# EAGLE board JeeNodeJR_LIPO_v1.2 (EAGLE 5.10)
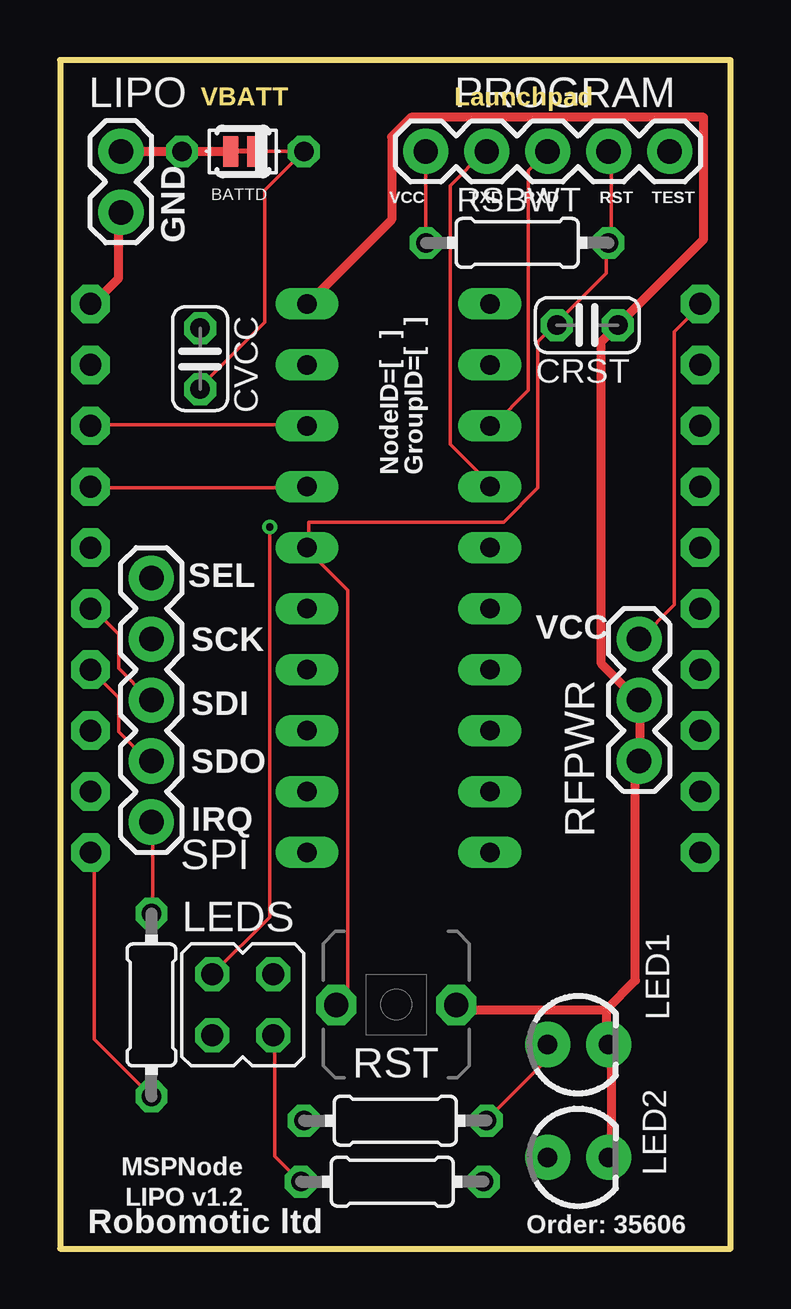
[diagram p0: board, top side]
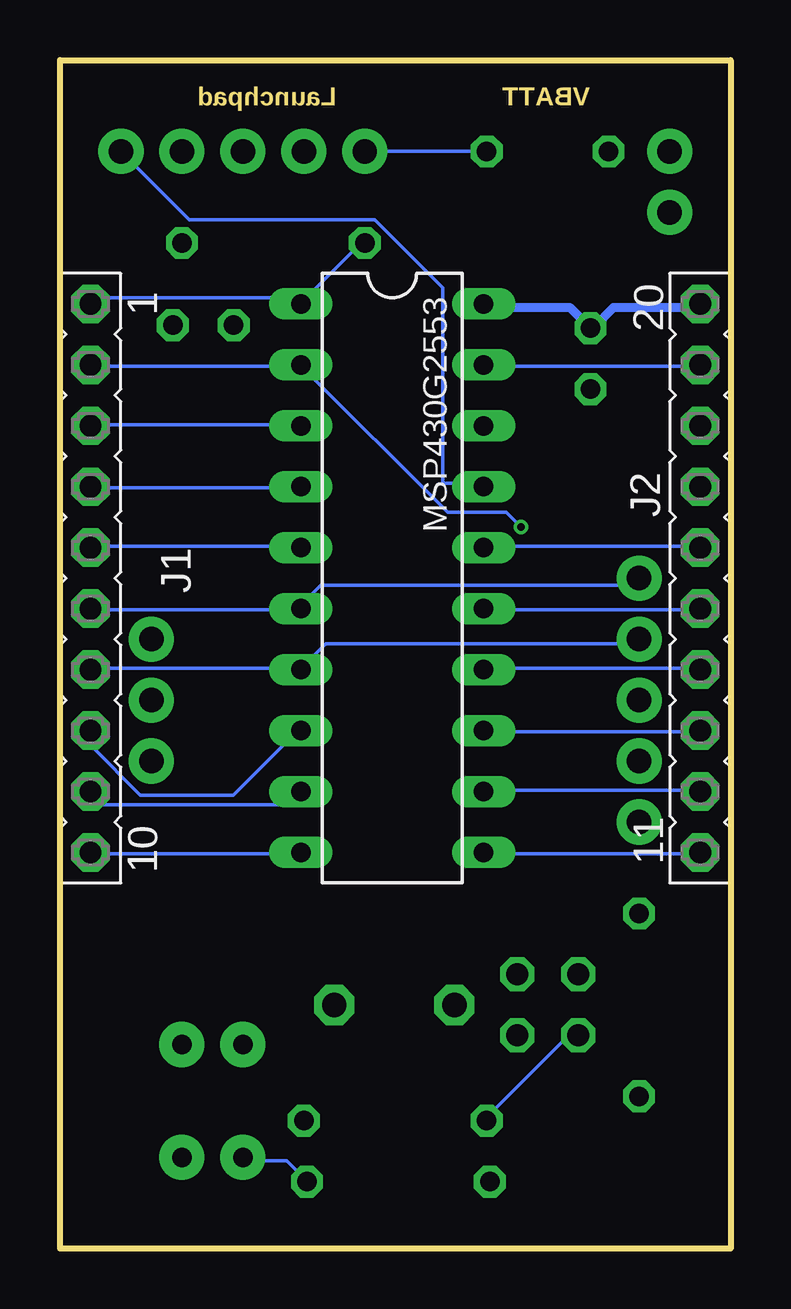
[diagram p1: board, bottom side, seen from below]

Size 27.94 x 49.53 mm. Coordinates in mm from the lower left corner, seen from the top.
Outline: 0,0 27.94,0 27.94,49.53 0,49.53 0,0
Copper layers (1*16): Top 0.035mm / dielectric 1.5mm / Bottom 0.035mm
Design rules "Fusion_eagle_rule_v1.1": minimum track width 6mil, minimum drill 12mil, track to track 6mil, track to pad 6mil, pad to pad 6mil, via to via 6mil, smd to smd 0mil, copper to edge 10mil, drill to drill 10mil, minimum pad ring 10mil, minimum via ring 6mil, stop-mask expansion 2mil, vias tented up to drill 100mil, thermal gap 10mil
Net classes: 1 power: width 0.381 mm, clearance 0.254 mm

## Footprints (pad centres in the part's own frame; a part is rotated, then mirrored left to right if it is on the bottom)
D-5 = drill 0.813 octagon: A 2.54,0; C -2.54,0
SJ_2S-TRACE = smd 0.635 x 1.27: 1 -0.508,0; 2 0.508,0
C025-024X044 = drill 0.813 octagon: 1 -1.27,0; 2 1.27,0
FE10 = drill 0.914 pad 1.6 octagon: 1 -11.43,0; 2 -8.89,0; 3 -6.35,0; 4 -3.81,0; 5 -1.27,0; 6 1.27,0; 7 3.81,0; 8 6.35,0; 9 8.89,0; 10 11.43,0
FE10H = drill 0.914 pad 1.6 octagon: 11 -11.43,0; 12 -8.89,0; 13 -6.35,0; 14 -3.81,0; 15 -1.27,0; 16 1.27,0; 17 3.81,0; 18 6.35,0; 19 8.89,0; 20 11.43,0
LED3MM = drill 0.813 pad 1.88 round: A -1.27,0; K 1.27,0
JP2Q = drill 0.914 octagon: 1 -1.27,-1.27; 2 -1.27,1.27; 3 1.27,-1.27; 4 1.27,1.27
1X02 = drill 1.016 pad 1.88 round: 1 0,0; 2 2.54,0
DIL20 = drill 0.813 long: 1 -11.43,-3.81; 2 -8.89,-3.81; 3 -6.35,-3.81; 4 -3.81,-3.81; 5 -1.27,-3.81; 6 1.27,-3.81; 7 3.81,-3.81; 8 6.35,-3.81; 9 8.89,-3.81; 10 11.43,-3.81; 11 11.43,3.81; 12 8.89,3.81; 13 6.35,3.81; 14 3.81,3.81; 15 1.27,3.81; 16 -1.27,3.81; 17 -3.81,3.81; 18 -6.35,3.81; 19 -8.89,3.81; 20 -11.43,3.81
1X05 = drill 1.016 pad 1.88 round: 1 0,0; 2 2.54,0; 3 5.08,0; 4 7.62,0; 5 10.16,0
1X03 = drill 1.016 pad 1.88 round: 1 0,0; 2 2.54,0; 3 5.08,0
0204/7 = drill 0.813 octagon: 1 -3.81,0; 2 3.81,0
PBTH = drill 1.016 pad 1.676 octagon: 1 -0.001,0.001; 2 5.001,0.001

## Placement (x,y rotation side)
BATTD  [D-5]  7.62,45.72 180 top
BATTSLD  SOLDERJUMPERTRACE  [SJ_2S-TRACE]  7.62,45.72 180 top
CRST  1nF  [C025-024X044]  21.97,38.48 180 top
CVCC  0.1uF  [C025-024X044]  5.84,37.08 270 top
J1  [FE10]  26.67,27.94 270 bottom
J2  [FE10H]  1.27,27.94 90 bottom
LED1  green  [LED3MM]  21.59,8.51 0 top
LED2  red  [LED3MM]  21.59,3.81 0 top
LEDS  [JP2Q]  7.62,10.16 0 top
LIPO  [1X02]  2.54,45.72 270 top
MSP430G2553  [DIL20]  14.1,27.94 270 bottom
PROGRAM  [1X05]  15.24,45.72 0 top
RFPWR  [1X03]  24.13,25.4 270 top
RIRQ  330  [0204/7]  3.81,10.16 270 top
RLEDG  270R  [0204/7]  13.97,5.33 180 top
RLEDR  470R  [0204/7]  13.84,2.79 180 top
RSBWT  47K  [0204/7]  19.05,41.91 0 top
RST  [PBTH]  16.51,10.16 180 top
SPI  [1X05]  3.81,17.78 90 top

## Library data of the parts
BATTD = diode
BATTSLD LED1 LED2 LIPO PROGRAM RFPWR SPI = SparkFun
CRST CVCC RIRQ RLEDG RLEDR RSBWT = resistor
J1 J2 = sMSP430
LEDS = stexas
MSP430G2553 = ic-package
RST = electricalmeter

## Nets
GND [power]: CRST.1 CVCC.1 J2.20 LED1.K LED2.K LIPO.2 MSP430G2553.20 RFPWR.2 RFPWR.3 RST.1
IRQ: RIRQ.1 SPI.1
N$14: LED2.A RLEDR.1
N$15: LEDS.3 RLEDR.2
N$33: LEDS.1 RLEDG.2
N$34: LED1.A RLEDG.1
P1.0: J1.2 LEDS.2 MSP430G2553.2
P1.1/RXD: J1.3 MSP430G2553.3 PROGRAM.3
P1.2/TXD: J1.4 MSP430G2553.4 PROGRAM.2
P1.3: J1.5 MSP430G2553.5
P1.6: LEDS.4
P2.0: J1.8 MSP430G2553.8
P2.1: J1.9 MSP430G2553.9
P2.2: J1.10 MSP430G2553.10
P2.3: J2.11 MSP430G2553.11 RIRQ.2
P2.4: J2.12 MSP430G2553.12
P2.5: J2.13 MSP430G2553.13
RST/SBWTDIO: CRST.2 J2.16 MSP430G2553.16 PROGRAM.4 RSBWT.2 RST.2
SCK: J1.7 MSP430G2553.7 SPI.4
SDI: J2.15 MSP430G2553.15 SPI.3
SDO: J2.14 MSP430G2553.14 SPI.2
SEL: J1.6 MSP430G2553.6 SPI.5
TEST/SBWTCK: J2.17 MSP430G2553.17 PROGRAM.5
VBATT [power]: BATTD.A BATTSLD.2 LIPO.1
VCC: BATTD.C BATTSLD.1 CVCC.2 J1.1 MSP430G2553.1 PROGRAM.1 RFPWR.1 RSBWT.1
XINR: J2.19 MSP430G2553.19
XOUTR: J2.18 MSP430G2553.18

## Tracks (layer width: path | path; a pad name or v marks a point on that pad's centre or on a via)
GND
  Top 0.381: 22.76,9.96 16.66,9.96 RST.1 | 22.76,9.96 22.76,8.53 LED1.K 22.96,8.33 22.96,3.86 LED2.K | J2.20 1.42,39.42 2.44,40.44 2.44,43.08 LIPO.2 | MSP430G2553.20 10.36,39.42 13.82,42.88 13.82,46.33 14.63,47.14 26.82,47.14 26.82,42.06 CRST.1 22.55,37.8 22.55,24.38 23.98,22.96 RFPWR.2 24.18,22.76 24.18,20.32 RFPWR.3 23.98,20.32 23.98,11.18 22.76,9.96
  Bottom 0.381: MSP430G2553.20 10.16,39.22 6.71,39.22 CVCC.1 5.69,38.41 4.88,39.22 1.42,39.22 J2.20
IRQ
  Top 0.152: RIRQ.1 3.86,14.02 3.86,17.68 SPI.1
N$14
  Bottom 0.152: RLEDR.1 17.68,2.85 18.49,3.66 20.32,3.66 LED2.A
N$15
  Top 0.152: RLEDR.2 9.96,2.85 8.94,3.86 8.94,8.74 LEDS.3
N$33
  Bottom 0.152: RLEDG.2 10.16,5.49 6.91,8.74 6.5,8.74 LEDS.1
N$34
  Top 0.152: RLEDG.1 17.88,5.49 20.32,7.92 LED1.A
P1.0  (via drill 0.3)
  Top 0.152: v8.74,30.07 8.74,13.82 LEDS.2
  Bottom 0.152: J1.2 26.62,36.78 18.09,36.78 MSP430G2553.2 17.88,36.78 11.79,30.68 9.35,30.68 v8.74,30.07
P1.1/RXD
  Top 0.152: PROGRAM.3 19.51,44.91 19.51,35.76 18.09,34.34 MSP430G2553.3
  Bottom 0.152: MSP430G2553.3 18.09,34.34 26.62,34.34 J1.3
P1.2/TXD
  Top 0.152: PROGRAM.2 17.68,45.72 16.26,44.3 16.26,33.53 17.88,31.9 MSP430G2553.4
  Bottom 0.152: MSP430G2553.4 18.09,31.7 26.62,31.7 J1.4
P1.3
  Bottom 0.152: MSP430G2553.5 18.09,29.26 26.62,29.26 J1.5
P2.0
  Bottom 0.152: MSP430G2553.8 18.09,21.54 20.73,18.9 24.59,18.9 26.62,20.93 26.62,21.54 J1.8
P2.1
  Bottom 0.152: MSP430G2553.9 18.09,18.9 18.49,18.49 26.21,18.49 26.62,18.9 J1.9
P2.2
  Bottom 0.152: MSP430G2553.10 18.09,16.46 26.62,16.46 J1.10
P2.3
  Top 0.152: RIRQ.2 1.42,8.74 1.42,16.46 J2.11
  Bottom 0.152: MSP430G2553.11 10.16,16.46 1.42,16.46 J2.11
P2.4
  Bottom 0.152: MSP430G2553.12 10.16,19.1 1.42,19.1 J2.12
P2.5
  Bottom 0.152: MSP430G2553.13 10.16,21.54 1.42,21.54 J2.13
RST/SBWTDIO
  Top 0.152: PROGRAM.4 22.96,45.72 22.96,42.06 RSBWT.2 22.76,41.86 22.76,40.64 20.73,38.61 CRST.2 20.52,38.41 19.91,37.8 19.91,31.7 18.49,30.28 10.36,30.28 10.36,29.26 MSP430G2553.16 10.36,29.06 11.99,27.43 11.99,10.57 11.58,10.16 RST.2
  Bottom 0.152: MSP430G2553.16 10.16,29.26 1.42,29.26 J2.16
SCK
  Bottom 0.152: J1.7 26.62,24.18 18.09,24.18 MSP430G2553.7 17.88,24.18 16.87,25.2 4.06,25.2 3.86,25.4 SPI.4
SDI
  Top 0.152: SPI.3 3.66,22.96 2.44,24.18 2.44,25.6 1.42,26.62 J2.15
  Bottom 0.152: MSP430G2553.15 10.16,26.62 1.42,26.62 J2.15
SDO
  Top 0.152: SPI.2 3.66,20.32 2.44,21.54 2.44,22.96 J2.14
  Bottom 0.152: MSP430G2553.14 10.16,24.18 1.42,24.18 J2.14
SEL
  Bottom 0.152: J1.6 26.62,26.62 18.09,26.62 MSP430G2553.6 17.88,26.82 17.07,27.64 4.06,27.64 3.86,27.84 SPI.5
TEST/SBWTCK
  Top 0.152: MSP430G2553.17 10.16,31.7 1.42,31.7 J2.17
  Bottom 0.152: PROGRAM.5 22.55,42.88 14.83,42.88 11.99,40.03 11.99,31.9 10.36,31.9 MSP430G2553.17
VBATT
  Top 0.381: LIPO.1 BATTD.A BATTSLD.2
VCC
  Top 0.152: CVCC.2 5.89,35.97 8.53,38.61 8.53,44.09 BATTD.C BATTSLD.1 | RFPWR.1 24.18,25.4 25.6,26.82 25.6,38.2 26.62,39.22 J1.1 | PROGRAM.1 RSBWT.1
  Bottom 0.152: 17.68,39.62 15.44,41.86 15.24,41.86 RSBWT.1 | 17.68,39.62 17.88,39.42 MSP430G2553.1 17.68,39.62 | 17.68,39.62 26.42,39.62 J1.1 | BATTD.C PROGRAM.1
XINR
  Bottom 0.152: MSP430G2553.19 10.16,36.78 1.42,36.78 J2.19
XOUTR
  Top 0.152: MSP430G2553.18 10.16,34.34 1.42,34.34 J2.18

## Text on the board
Dimension: VBATT | Launchpad
tPlace: VCC | TXD | RXD | RST | TEST | SEL | SCK | VCC | SDI | SDO | IRQ | MSPNode | LIPO v1.2 | Robomotic ltd
tNames: GND | NodeID=[ ] | GroupID=[ ] | Order: 35606